# Altium PCB PCB1 - 修改mos管.PcbDoc
Units mil, origin at the board's own origin, x right, y up, seen from the top; angles counter-clockwise.
Board outline 3942.02 x 3942.03 mil, 2 copper layers (Top Layer, Bottom Layer); 43 components, 38 nets, 173 pads, 24 vias.
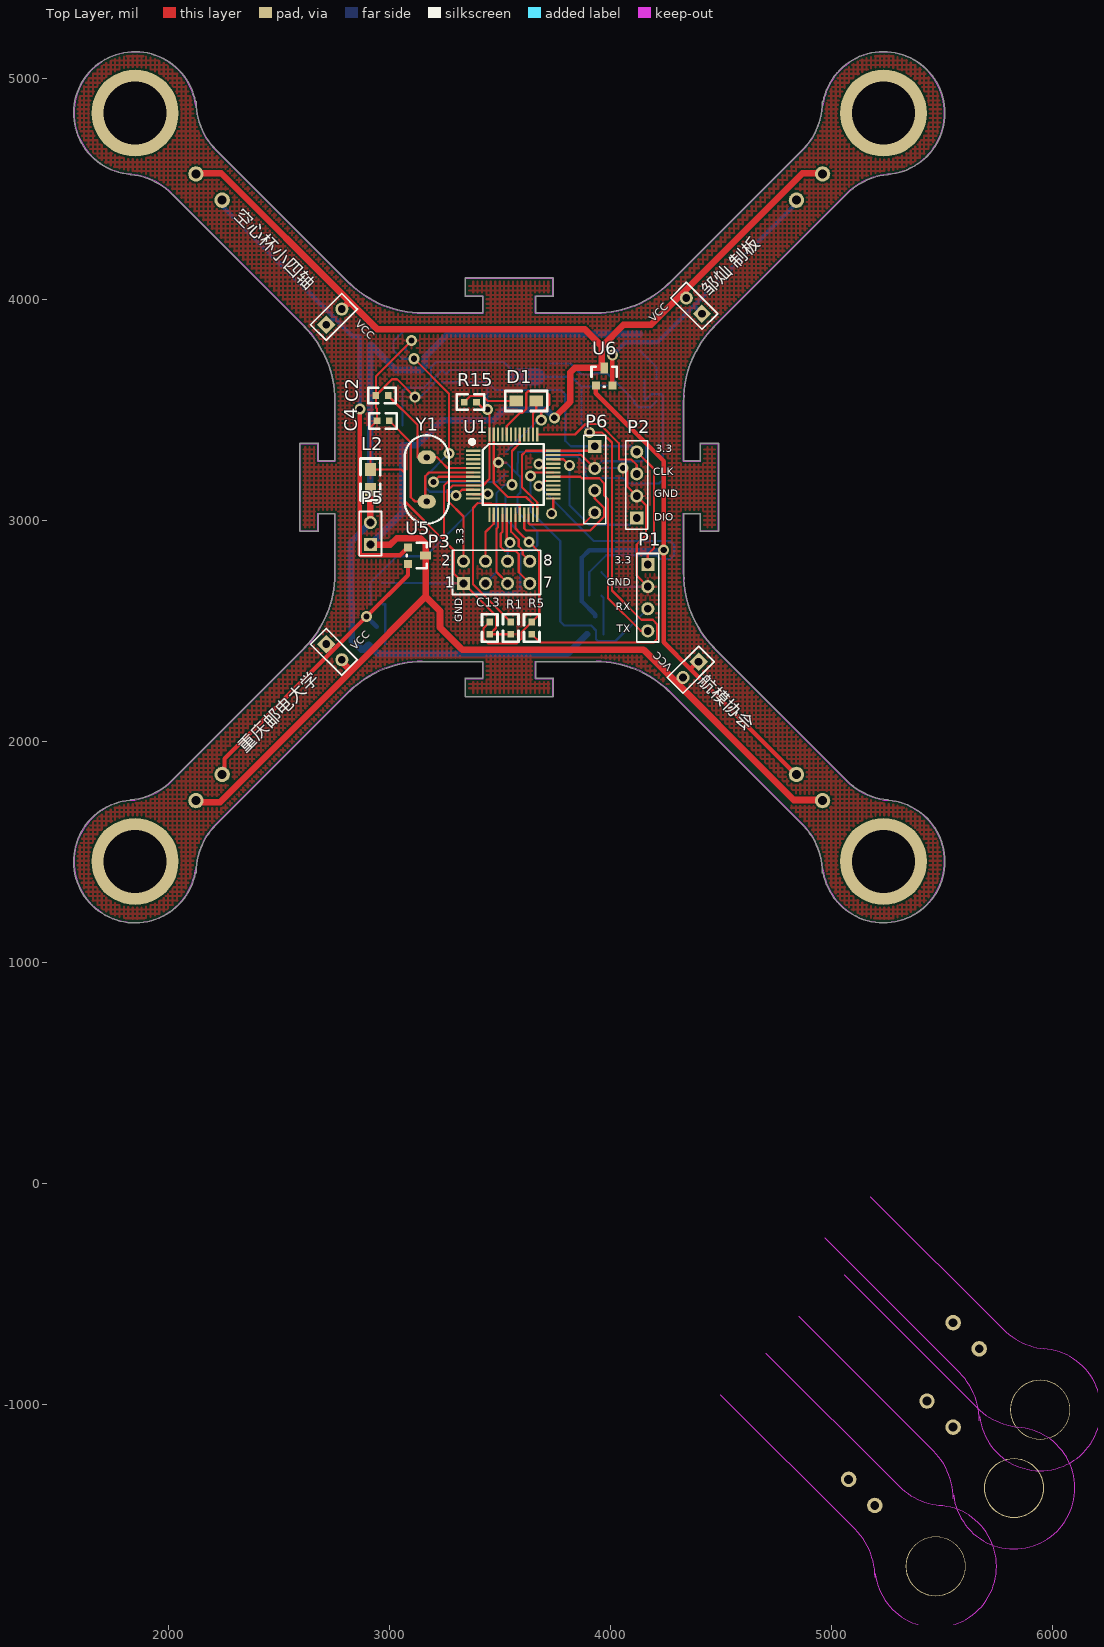
[diagram p0: Top Layer view]
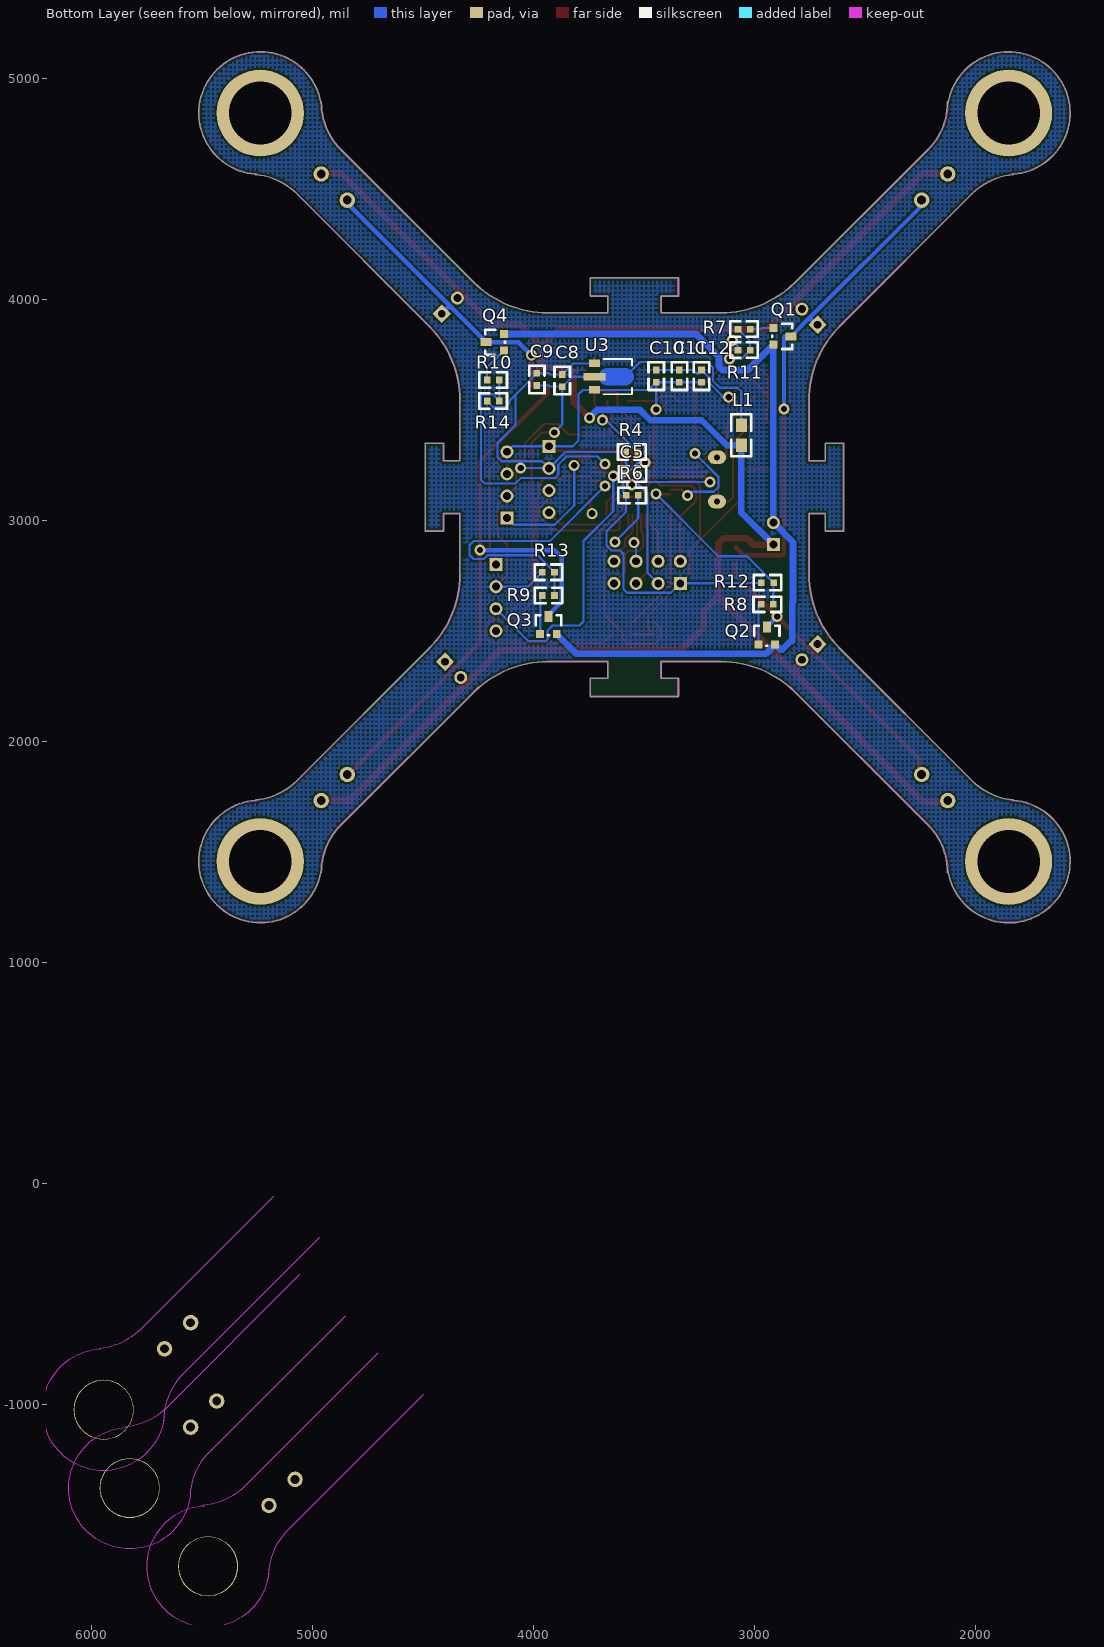
[diagram p1: Bottom Layer view, seen from below]

## Layer stack, top to bottom
Top Solder: solder mask 0.4, Solder Resist, Dk 3.5
Top Layer: signal copper 1.4
Dielectric 1: dielectric 12.6, FR-4, Dk 4.8
Bottom Layer: signal copper 1.4
Bottom Solder: solder mask 0.4, Solder Resist, Dk 3.5

## Board outline
1828.55,1733.94 ccw(c1850.39,1456.69) 2123.7,1405.26 ccw(c2124.88,1407.48) 2127.39,1407.48 cw(c2431.1,1407.48) 2216.33,1622.22 cw(c2431.1,1407.48) 2216.35,1622.24 2820.31,2226.2 ccw(c2820.49,2228.71) 2822.24,2226.9 cw(c3149.61,1889.76) 3149.61,2359.69 3422.68,2359.69 3422.68,2285.98 3346.46,2285.98 ccw(c3346.46,2283.46) 3343.94,2283.46 3343.94,2204.72 ccw(c3346.46,2204.72) 3346.46,2202.21 3740.16,2202.21 ccw(c3740.16,2204.72) 3742.67,2204.72 3742.67,2283.46 ccw(c3740.16,2283.46) 3740.16,2285.98 3663.93,2285.98 3663.93,2359.69 3937.01,2359.69 cw(c3937.01,1889.76) 4264.37,2226.9 ccw(c4266.12,2228.71) 4266.31,2226.2 4870.27,1622.24 ccw(c4872.05,1624.02) 4870.28,1622.22 ccw(c4655.51,1407.48) 4870.27,1622.24 4870.28,1622.22 cw(c4655.51,1407.48) 4959.22,1407.48 ccw(c4961.74,1407.48) 4962.91,1405.26 ccw(c5236.22,1456.69) 5514.33,1456.69 ccw(c5236.22,1456.69) 5258.06,1733.94 ccw(c5255.94,1732.6) 5256.18,1735.1 cw(c5285.43,2037.4) 5070.68,1822.64 4471.67,2421.65 ccw(c4469.16,2421.76) 4471.68,2421.76 ccw(c4469.16,2421.76) 4470.94,2423.54 cw(c4803.15,2755.91) 4333.22,2755.91 4333.22,3028.98 4406.93,3028.98 4406.93,2952.76 ccw(c4409.45,2952.76) 4409.45,2950.24 4488.19,2950.24 ccw(c4488.19,2952.76) 4490.7,2952.76 4490.7,3346.46 ccw(c4488.19,3346.46) 4488.19,3348.97 4409.45,3348.97 ccw(c4409.45,3346.46) 4406.93,3346.46 4406.93,3270.23 4333.22,3270.23 4333.22,3543.31 cw(c4803.15,3543.31) 4470.94,3875.67 ccw(c4469.16,3877.45) 4471.68,3877.45 ccw(c4469.16,3877.45) 4471.67,3877.57 5070.68,4476.57 cw(c5285.43,4261.81) 5256.18,4564.11 ccw(c5255.94,4566.61) 5258.06,4565.27 ccw(c5236.22,4842.52) 5514.33,4842.52 ccw(c5236.22,4842.52) 4962.91,4893.96 ccw(c4961.74,4891.73) 4959.22,4891.73 cw(c4655.51,4891.73) 4870.28,4676.99 cw(c4655.51,4891.73) 4870.27,4676.98 cw(c4872.05,4675.2) 4870.28,4676.99 4870.27,4676.98 4266.31,4073.01 ccw(c4266.12,4070.5) 4264.37,4072.31 cw(c3937.01,4409.45) 3937.01,3939.52 3663.93,3939.52 3663.93,4013.23 3740.16,4013.23 ccw(c3740.16,4015.75) 3742.67,4015.75 3742.67,4094.49 ccw(c3740.16,4094.49) 3740.16,4097 3346.46,4097 ccw(c3346.46,4094.49) 3343.94,4094.49 3343.94,4015.75 ccw(c3346.46,4015.75) 3346.46,4013.23 3422.68,4013.23 3422.68,3939.52 3149.61,3939.52 cw(c3149.61,4409.45) 2822.24,4072.31 ccw(c2820.49,4070.5) 2820.31,4073.01 2216.35,4676.98 cw(c2431.1,4891.73) 2216.33,4676.99 cw(c2431.1,4891.73) 2127.39,4891.73 ccw(c2124.88,4891.73) 2123.7,4893.96 ccw(c1850.39,4842.52) 1828.55,4565.27 ccw(c1830.68,4566.61) 1830.44,4564.11 cw(c1801.18,4261.81) 2015.94,4476.57 2614.94,3877.57 ccw(c2617.45,3877.45) 2615.67,3875.67 cw(c2283.46,3543.31) 2753.39,3543.31 2753.39,3270.23 2679.68,3270.23 2679.68,3346.46 ccw(c2677.17,3346.46) 2677.17,3348.97 2598.43,3348.97 ccw(c2598.43,3346.46) 2595.91,3346.46 2595.91,2952.76 ccw(c2598.43,2952.76) 2598.43,2950.24 2677.17,2950.24 ccw(c2677.17,2952.76) 2679.68,2952.76 2679.68,3028.98 2753.39,3028.98 2753.39,2755.91 cw(c2283.46,2755.91) 2615.67,2423.54 ccw(c2617.45,2421.76) 2614.94,2421.65 2015.94,1822.64 cw(c1801.18,2037.4) 1830.44,1735.1 ccw(c1830.68,1732.6)

## Design rules (kind name [scope] priority, off if disabled: settings)
Clearance [All] p1: gap=7.8
PolygonConnect [All] p1: connectstyle=Relief reliefconductorwidth=10 reliefentries=4 polygonreliefangle="90 Angle" airgapwidth=10
RoutingVias [All] p1: holewidth=28 width=50 viastyle="Through Hole" minholewidth=28 minwidth=50 maxholewidth=28 maxwidth=50
SolderMaskExpansion [All] p1: expansion=4
UnpouredPolygon [All] p1: allowunpoured=FALSE
Width Width_5 [InNet('MOTO4')] p1: maxlimit=20 minlimit=20 preferedwidth=20
Width Width_4 [InNet('MOTO3')] p2: maxlimit=20 minlimit=20 preferedwidth=20
Width Width_3 [InNet('MOTO2')] p3: maxlimit=20 minlimit=20 preferedwidth=20
Width Width_2 [InNet('MOTO1')] p4: maxlimit=20 minlimit=20 preferedwidth=20
Width Width_1 [InNet('VCC_BAT')] p5: maxlimit=30 minlimit=30 preferedwidth=30
Width [InNet('GND_BAT')] p6: maxlimit=30 minlimit=30 preferedwidth=30
29 further rules are at their usual default settings.

## Classes and differential pairs
component class "Sheet1 - 修改mos管": C2 C4 C5 C8 C9 C10 C11 C12 C13 D1 L1 L2 P1 P2 P3 P5 P6 Q1 Q2 Q3 Q4 R1 R4 R5 R6 R7 R8 R9 R10 R11 R12 R13 R14 R15 U1 U3 U5 U6 Y1

## Components (designator, comment, footprint, x,y, rotation, side; value= is the part's Value field where it differs from the comment)
C2 "cap" 0603 2940,3565 r0 top
C4 "cap" 0603 2945,3450 r0 top
C5 "cap" 0603 3580,3210 r180 bottom
C8 "cap" 0603 3870,3660 r270 bottom
C9 "cap" 0603 3985,3665 r270 bottom
C10 "cap" 0603 3445,3680 r270 bottom
C11 "cap" 0603 3340,3680 r270 bottom
C12 "cap" 0603 3240,3680 r270 bottom
C13 "cap" 0603 3455,2485 r90 top
D1 "LED0" 0805 3575,3540 r0 top
L1 "Inductor" 0805 3060,3340 r90 bottom
L2 "Inductor10mH" 0805 2915,3230 r270 top
P1 "Header 4" HDR1X4 4170,2800 r270 top
P2 "Header 4" HDR1X4 4120,3010 r90 top
P3 "Header 4X2" HDR2X4 3336,2715 r0 top
P5 "Header 2" HDR1X2 2915,2890 r90 top
P6 "Header 4" HDR1X4 3930,3335 r270 top
Q1 "SI2302" SOT-23 2915,3870 r270 bottom
Q2 "SI2302" SOT-23 2982,2438 r180 bottom
Q3 "SI2302" SOT-23 3970,2485 r180 bottom
Q4 "SI2302" SOT-23 4134,3768 r90 bottom
R1 "res" 0603 3550,2540 r270 top
R4 "res" 0603 3583,3309 r180 bottom
R5 "res" 0603 3645,2485 r90 top
R6 "res" 0603 3526,3113 r0 bottom
R7 "res" 0603 3075,3865 r180 bottom
R8 "res" 0603 2915,2620 r0 bottom
R9 "res" 0603 3905,2660 r0 bottom
R10 "res" 0603 4155,3635 r0 bottom
R11 "res" 0603 3075,3770 r180 bottom
R12 "res" 0603 2969,2718 r180 bottom
R13 "res" 0603 3960,2765 r180 bottom
R14 "res" 0603 4210,3540 r180 bottom
R15 "res" 0603 3395,3535 r180 top
U1 "STM32F103C8T6" LQFP48S 3380,3315 r0 top
U3 "XC6203E" SOT-89 3725,3710 r270 bottom
U5 "BAT54C" SOT-23 3085,2878 r270 top
U6 "BAT54C" SOT-23 3935,3610 r0 top
Y1 "5032xtal" XTAL 3170,3185 r90 top
? "Comment" HDR1X2 2715,2440 r315 top
? "Comment" HDR1X2 2715,3885 r45 top
? "Comment" HDR1X2 4415,3935 r135 top
? "Comment" HDR1X2 4400,2360 r225 top

## Footprints (in the part's own frame and the unit in brackets; to place one, negate y for a bottom-side part, rotate by r counter-clockwise, add the part's x,y. Pads: shape width x height; smd on the part's side, far side on the other; paste and mask are expansions set on the pad)
0603 [mil]
  rect 30x30 smd: 1(0,0) 2(55,0)
  silkscreen extent -35,-35 90,35
0805 [mil]
  rect 60x50 smd: 1(0,0) 2(90,0)
  silkscreen extent -50,-45 140,45
HDR1X2 [mm] "Connector; Header; 2 Position"
  rect 1.5x1.5 hole 0.9: 1(0,0)
  round 1.5 hole 0.9: 2(2.54,0)
  silkscreen extent -1.27,-1.27 3.81,1.27
HDR1X4 [mm] "Connector; Header; 4 Position"
  rect 1.5x1.5 hole 0.9: 1(0,0)
  round 1.5 hole 0.9: 2(2.54,0) 3(5.08,0) 4(7.62,0)
  silkscreen extent -1.27,-1.27 8.89,1.27
HDR2X4 [mm] "Connector; Header; 4x2 Position"
  rect 1.5x1.5 hole 0.9: 1(0,0)
  round 1.5 hole 0.9: 2(0,2.54) 3(2.54,0) 4(2.54,2.54) 5(5.08,0) 6(5.08,2.54) 7(7.62,0) 8(7.62,2.54)
  silkscreen extent -1.27,-1.27 8.89,3.81
LQFP48S [mil] "DPIN-0.5"
  rect 65x10 smd: 1(0.42,0.29) 2(0.42,-19.39) 3(0.42,-39.08) 4(0.42,-58.76) 5(0.42,-78.45) 6(0.42,-98.13) 7(0.42,-117.82) 8(0.42,-137.5) 9(0.42,-157.19) 10(0.42,-176.87) 11(0.42,-196.56) 12(0.42,-216.24) 25(362.63,-216.24) 26(362.63,-196.56) 27(362.63,-176.87) 28(362.63,-157.19) 29(362.63,-137.5) 30(362.63,-117.82) 31(362.63,-98.13) 32(362.63,-78.45) 33(362.63,-58.76) 34(362.63,-39.08) 35(362.63,-19.39) 36(362.63,0.29)
  rect 10x65 smd: 13(73.26,-289.08) 14(92.94,-289.08) 15(112.63,-289.08) 16(132.31,-289.08) 17(152,-289.08) 18(171.68,-289.08) 19(191.37,-289.08) 20(211.05,-289.08) 21(230.74,-289.08) 22(250.42,-289.08) 23(270.11,-289.08) 24(289.79,-289.08) 37(289.79,73.13) 38(270.11,73.13) 39(250.42,73.13) 40(230.74,73.13) 41(211.05,73.13) 42(191.37,73.13) 43(171.68,73.13) 44(152,73.13) 45(132.31,73.13) 46(112.63,73.13) 47(92.94,73.13) 48(73.26,73.13)
  silkscreen extent -10,-246 319,46
SOT-23 [mil]
  rect 36x36 smd: 1(0,0) 2(75,0)
  rect 36x50 smd: 3(38,80)
  silkscreen extent -20,-5 95,85
SOT-89 [mil]
  rect 34x50 smd: 1(0,0) 3(120,0)
  rect 34x100 smd: 2(60,0)
  Top Layer lines w80: 60,140 60,93 60,62 60,60
  silkscreen extent -20,40 140,170
XTAL [mil]
  oval 62x82 hole 28: 1(-100,0) 2(100,0)
  silkscreen extent -200,-100 200,100

## Part data
D1: "Typical INFRARED GaAs LED"
L2: library part Inductor
P1 P2 P6: "Header, 4-Pin"
P3: "Header, 4-Pin, Dual row"
P5: "Header, 2-Pin"
U3: library part XC6203

## Free pads (board coordinates)
  round 70 hole 40: 0(2125.98,1732.28) 0(2125.98,4566.93) 0(4960.63,1732.28) 0(4960.63,4566.93) 0(5196.85,-1456.69) 0(5551.18,-1102.36) 0(5669.29,-748.03) 1(2244.09,1850.39) 1(2244.09,4448.82) 1(4842.52,1850.39) 1(4842.52,4448.82) 1(5078.74,-1338.58) 1(5433.07,-984.25) 1(5551.18,-629.92)
  round 50 hole 32: 2(3735,3030)
  round 393.7 hole 283.46: 3(1850.39,1456.69) 3(1850.39,4842.52) 3(5236.22,1456.69) 3(5236.22,4842.52)
  round 271.65 hole 263.78: 3(5472.44,-1732.28) 3(5826.77,-1377.95) 3(5944.88,-1023.62)

## Via types
v1: diameter 50, hole 28, Top Layer to Bottom Layer, 24 vias

## Nets (pads, with @x,y where several pads share a name; then routed paths per layer and width w, separated by ;. In a path a pad name is that pad's centre, name@x,y a point inside that pad or via, vN(x,y) a via of type N, cw(c..) or ccw(c..) an arc to the next point about the centre after c; other vN are vias at no path point)
3.3V: C10.2 C11.2 C12.2 P1.1 P2.4 P3.2 P6.1 R15.1 U1.9 U1.24 U1.36 U1.48 U3.3 | length 3413.8
  Top Layer w10: P3.2 3336,3017.2 3265.2,3088 3265.2,3136 3287.01,3157.81 U1.9 3424,3157.81 3453.26,3187.07 U1.48 3453.26,3476.74 ; R15.1 3453.26,3476.74 ; v1(3445,3501) 3453.26,3492.74 3453.26,3476.74 ; U1.24 3669.79,3081.21 3601,3150 3601,3296 3620.29,3315.29 U1.36 3910.29,3315.29 P6.1 ; P2.4 4197.93,3232.07 4197.93,2874.14 4170,2846.21 P1.1
  Bottom Layer w10: C12.2 C11.2 C10.2 ; v1(3445,3501) C10.2 ; P2.4 4095,3335 P6.1 3822,3335 3797,3360 3797,3569 3776,3590 U3.3 3480,3590 C10.2
AD: C13.2 R5.2 R6.1 U1.19 | length 1172.3
  Top Layer w10: C13.2 3427,2512 3427,2464 3448,2443 3577,2443 3598,2464 3598,2493 R5.2 3679,2574 3679,2856.3 v1@3632.65,2902.65 ; U1.19 3571.37,2962.63 3589.84,2944.16 v1@3632.64,2902.66 ; v1(3632,2902) v1@3632.65,2902.65
  Bottom Layer w10: R6.1 3526,3008 v1(3632,2902)
GND: C2.1 C4.1 C5.1 C8.1 C9.1 C10.1 C11.1 C12.1 C13.1 L2.1 P1.2 P2.2 P3.1 P6.2 R1.2 R4.1 R6.2 R11.1 R12.1 R13.1 R14.1 U1.8 U1.23 U1.35 U1.47 U3.1 | length 7653.6
  Top Layer w10: v1(3101,3813) 2940,3652 C2.1 ; v1(3117,3557) 3036,3638 3013,3638 C2.1 ; U1.8 3268.02,3177.5 3247.4,3156.87 3247.4,2909.6 ; U1.47 3472.94,3283.06 ; v1(3495,3261) 3472.94,3283.06 ; R1.2 C13.1 3483,2513 3483,2568 P3.1 3293,2758 3293,2864 3247.4,2909.6 ; U1.23 3650.11,3075 3619.06,3106.05 3536,3106.05 3472.94,3169.1 3472.94,3283.06 ; U1.35 3869.39,3295.61 P6.2 ; v1(4058,3237) 4064,3237 4077,3224 4077,3153 P2.2 4162.33,3067.67 4162.33,2932.67 4120,2890.34 4120,2750 P1.2 ; C2.1 2940,3510 2945,3505 C4.1 2915,3420 L2.1 3056,3230 3072,3214 3072,3085 3247.4,2909.6
  Bottom Layer w10: R12.1 3156,2715 P3.1 3379,2672 3577,2672 3593.2,2688.2 3593.2,2848 3609.4,2864.2 3648,2864.2 3669.8,2886 3669.8,2950 3581,3038.8 R6.2 3593.8,3125.8 3593.8,3196.2 C5.1 ; R11.1 3075,3787 v1(3101,3813) ; v1(3117,3557) 3140.37,3557 3207.6,3624.23 3207.6,3647.6 C12.1 3257.8,3662.2 3275.6,3680 C11.1 C10.1 ; v1(3495,3261) 3529,3261 C5.1 ; U3.1 3820,3710 C8.1 3925,3660 3930,3665 C9.1 4081,3569 ; R13.1 4025,2700 P1.2 ; v1(4058,3237) P6.2@3932,3237 ; R14.1 4182,3512 4128,3512 4109,3531 4109,3541 4081,3569 ; C5.1 3580,3258 3583,3261 R4.1 3856,3309 P6.2 P6.2@3932,3237 ; P6.2@3932,3237 3962,3267 4144,3267 4163,3286 4163,3350 4081,3432 4081,3569
GND_BAT: L2.2 P5.2 Q1.2 Q2.2 Q3.2 Q4.2 | length 4029.1
  Top Layer w30: P5.2 L2.2
  Bottom Layer w30: 2830,2454 2830,2628 2826,2632 2826,2901 P5.2 Q1.2 3030,3680 3144.8,3680 3160.8,3696 3160.8,3738.8 3265,3843 Q4.2 ; 2835,2455 2875,2415 2884,2415 Q2.2 2949,2396 3806,2396 Q3.2
INC: pad.2 U1.25 | length 66.1
  Top Layer w10: pad.2@3742.63,3032.63 U1.25
LED1: D1.2 U1.38 | length 158
  Top Layer w10: U1.38 3650.11,3483 3665,3497.89 D1.2
MISO: P3.7 U1.16 | length 396.7
  Top Layer w10: U1.16 3512.31,2948.07 3505.14,2940.89 3505.14,2880 3523.94,2861.2 3572.8,2861.2 3586,2848 3586,2765 P3.7
MOSI: P3.6 U1.17 | length 220.9
  Top Layer w10: U1.17 3532,2913 v1(3546,2899)
  Bottom Layer w10: P3.6 3536,2889 v1(3546,2899)
MOTO1: ?.1@2715,3885 pad.1@2244.09,4448.82 Q1.3 U5.1 | length 2167.9
  Top Layer w20: v1(2867,3504) 2867,2847 2872,2842 3049,2842 U5.1
  Bottom Layer w20: pad.1@2245,4455 2245,4422 2751,3916 ; ?.1@2715,3880 2751,3916 ; v1(2867,3504) 2867,3828 2863,3832 Q1.3 2751,3916
MOTO2: ?.1@2715,2440 pad.1@2244.09,1850.39 Q2.3 U5.2 | length 1378.8
  Top Layer w20: pad.1@2240,1855 2255,1870 2255,1922 2746.5,2413.5 ; 2731.5,2413.5 2746.5,2413.5 ; U5.2 3085,2752 v1(2897.5,2564.5) 2746.5,2413.5
  Bottom Layer w20: v1(2897.5,2564.5) Q2.3
MOTO3: ?.1@4400,2360 pad.1@4842.52,1850.39 Q3.3 U6.1 | length 2863.5
  Top Layer w20: U6.1 3935,3575 4242,3268 v1(4242,2865.13) 4242,2448 4362.5,2327.5 ; ?.1@4395,2360 4362.5,2327.5 ; pad.1@4845,1845 4362.5,2327.5
  Bottom Layer w20: Q3.3 3932,2573 3872,2633 3872,2832 3905.13,2865.13 v1(4242,2865.13)
MOTO4: ?.1@4415,3935 pad.1@4842.52,4448.82 Q4.3 U6.2 | length 1328.8
  Top Layer w20: U6.2 v1(4010,3747)
  Bottom Layer w20: v1(4010,3747) 4069,3806 Q4.3 4379,3971 ; ?.1@4420,3930 4415,3935 4379,3971 ; pad.1@4845,4450 4845,4437 4379,3971
NetC2_2: C2.2 U1.5 Y1.2 | length 607.9
  Top Layer w10: C2.2 3128,3432 3128,3285 Y1.2 3216,3285 3236,3265 3263.45,3236.55 U1.5
NetC4_2: C4.2 U1.6 Y1.1 | length 805.7
  Top Layer w10: C4.2 3098,3352 3098,3104 3117,3085 Y1.1@3163.2,3085 ; Y1.1 Y1.1@3163.2,3085 ; U1.6 3180.07,3216.87 3163.2,3200 Y1.1@3163.2,3085
NetD1_1: D1.1 R15.2 | length 256.1
  Top Layer w10: R15.2 3368,3563 3423,3563 3446,3540 D1.1
NetQ1_G: Q1.1 R7.2 | length 107.1
  Bottom Layer w10: Q1.1 2965,3870 2970,3865 R7.2
NetQ2_G: Q2.1 R8.2 | length 194
  Bottom Layer w10: R8.2 2982,2620 Q2.1
NetQ3_G: Q3.1 R9.2 | length 179.1
  Bottom Layer w10: R9.2 3970,2650 Q3.1
NetQ4_G: Q4.1 R10.2 | length 164.5
  Bottom Layer w10: Q4.1 4210,3692 R10.2
NetR1_1: R1.1 U1.20 | length 854.2
  Top Layer w10: R1.1 3379,2711 3379,3056 3401,3078 3591.05,3072 U1.20
NetR4_2: R4.2 U1.44 | length 693.9
  Top Layer w10: U1.44 3532,3427 3592,3487 3603,3487 3620,3504 3620,3576 3628,3584 3707.76,3584 3723.76,3568 3723.76,3522.76 3688,3487 v1(3688,3453)
  Bottom Layer w10: R4.2 3672,3453 v1(3688,3453)
NRST: C5.2 U1.7 | length 527.9
  Top Layer w10: v1(3201,3174) 3224.18,3197.18 U1.7
  Bottom Layer w10: v1(3201,3174) 3489,3174 C5.2
PWM1: R7.1 R11.2 U1.10 | length 1161
  Top Layer w10: v1(3113,3731) 3270,3574 v1(3270,3303) ; v1(3303,3112.13) 3329,3138.13 U1.10
  Bottom Layer w10: R7.1 3020,3810 R11.2 3059,3731 v1(3113,3731) ; v1(3270,3303) 3163.2,3196.2 3163.2,3149.8 3184,3129 3286.13,3129 v1(3303,3112.13)
PWM2: R8.1 R12.2 U1.11 | length 863.2
  Top Layer w10: U1.11 3444.44,3118.44 v1(3446,3120)
  Bottom Layer w10: R8.1 2915,2668 2914,2669 R12.2 3034,2838 3164,2838 v1(3446,3120)
PWM3: R9.1 R13.2 U1.29 | length 1380.2
  Top Layer w10: v1(3677,3156) 3698.5,3177.5 U1.29
  Bottom Layer w10: v1(3677,3156) 3927,2906 4272,2906 4290,2888 4290,2843 4272,2825 4225.33,2825 4208,2842.33 3982.33,2842.33 R13.2 R9.1
PWM4: R10.1 R14.2 U1.32 | length 1305.7
  Top Layer w10: v1(3677,3255) 3695.45,3236.55 U1.32
  Bottom Layer w10: v1(3677,3255) 3711.02,3289.02 3850.8,3289.02 3887.67,3252.15 3887.67,3206.33 3903,3191 4058,3191 4082,3167 4221,3167 4238,3184 4238,3564 4232,3570 4185,3570 R14.2 R10.1
RX1: P1.3 U1.31 | length 1341.5
  Top Layer w10: v1(3639,3201) 3654.87,3216.87 U1.31
  Bottom Layer w10: v1(3639,3201) 3639,3041.37 3774,2906.37 3774,2542 3792,2524 3914,2524 3936,2502 3936,2462 3944,2454 4024,2454 P1.3
SCL: P6.3 U1.21 | length 590.4
  Top Layer w10: U1.21 3610.74,2962.82 3619.56,2954 3910,2954 3972.33,3016.33 3972.33,3056.67 3930,3099 P6.3
SDA: P6.4 U1.22 | length 364.1
  Top Layer w10: U1.22 3630.42,2986.2 3636,2980.62 3875.62,2980.62 P6.4
SWCLK: P2.3 U1.37 | length 630.2
  Top Layer w10: U1.37 3669.79,3388 3840.2,3388 3888,3435.8 3952.2,3435.8 4039.18,3348.82 4039.55,3275.45 4095.47,3275.45 4120,3250.92 P2.3
SWDIO: P2.1 U1.34 | length 618.4
  Top Layer w10: U1.34 3789.08,3275.92 v1(3816,3249)
  Bottom Layer w10: v1(3816,3249) 3816,3068 3904,2980 4090,2980 P2.1
TX1: P1.4 U1.30 | length 1010.2
  Top Layer w10: U1.30 3864.82,3197.18 3872,3190 3950,3190 3973,3167 3973,3112.26 3990.13,3095.13 3990.13,2647.96 4138.09,2500 P1.4
VCC: C8.2 C9.2 L1.2 R5.1 U3.2 | length 3073.1
  Top Layer w10: R5.1 3682,2448 4197,2448 4213,2464 4213,2529 4192,2550 4141,2550 4007.93,2683.07 4007.93,3352.07 3962,3398 v1(3906,3398)
  Bottom Layer w10: L1.2 3060,3584 3076,3600 3156.6,3600 3188.6,3632 3188.6,3692.07 3213.06,3716.53 3518.47,3716.53 3585,3650 ; 3665,3650 U3.2 3825,3650 C8.2 ; v1(3906,3398) 3870,3434 C8.2 ; C9.2 3930,3610 3925,3605 C8.2
VCC_BAT: ?.2 L1.1 P5.1 pad.0@2125.98,1732.28 pad.0@2125.98,4566.93 pad.0@4960.63,1732.28 pad.0@4960.63,4566.93 U5.3 U6.3 | length 9527.7
  Top Layer w30: pad.0@2125,4565 2130,4570 2240,4570 2820,3990 ; pad.0@2140,1725 2235,1725 2835,2325 ; ?.2@2780,2365 2820,2325 2835,2325 ; ?.2@2785,3955 2785.71,3955.71 2820,3990 ; P5.1 3005,2890 3034,2919 3142,2919 3165,2896 U5.3 3165,2655 ; v1(3747,3464) 3819,3536 3819,3669 3840,3690 U6.3 3962.2,3700.8 3962.2,3787.2 ; ?.2@4327.5,4022.5 ?.2@4322.5,4022.5 ; pad.0@4955,4570 4870,4570 ?.2@4322.5,4022.5 ; pad.0@4960,1735 4830,1735 4150,2415 3330,2415 3230,2515 3230,2590 3165,2655 ; 2820,3990 2945,3865 3884.4,3865 3962.2,3787.2 ; 2835,2325 3165,2655 ; 3962.2,3787.2 4060,3885 4185,3885 ?.2@4322.5,4022.5
  Bottom Layer w30: P5.1 3060,3035 L1.1 3126,3340 3239,3453 3472,3453 3520,3501 3710,3501 v1(3747,3464)
W_CE: P3.3 U1.41 | length 756.7
  Top Layer w10: v1(3556,3161) 3556,3314 3591.05,3349.05 U1.41
  Bottom Layer w10: P3.3 3485,2764 3485,3123 3523,3161 v1(3556,3161)
W_CSN: P3.4 U1.14 | length 226.2
  Top Layer w10: P3.4 3436,2947.36 3472.94,2984.3 U1.14
W_IRQ: P3.8 U1.18 | length 245.8
  Top Layer w10: U1.18 3551.68,2948.02 3586.2,2913.5 3586.2,2882.3 3604.5,2864 3604.5,2846.5 P3.8
W_SCK: P3.5 U1.15 | length 335.1
  Top Layer w10: U1.15 3492.63,2968.39 3485.14,2960.89 3485.14,2765.86 P3.5
pads on no net: U1.1 U1.2 U1.3 U1.4 U1.12 U1.13 U1.26 U1.27 U1.28 U1.33 U1.39 U1.40 U1.42 U1.43 U1.45 U1.46

## Polygon pours and split planes (outlines as drawn)
GND on Top Layer "Top Layer-No Net" (hatched 90Degree grid 20 track 10, remove dead copper, pour order 4): 1055,5680 1055,540 5890,540 6285,935 6030,1190 6030,5535
GND on Bottom Layer "Top Layer-No Net" (hatched 90Degree grid 20 track 10, remove dead copper, pour order 6): 1005,5750 1005,695 935,625 975,665 6560,665 6560,5265 6305,5520

## Keep-outs
Keep-Out Layer:
  lines w5: 1830.68,1732.6 ccw(c1801.18,2037.4) 2017.72,1820.87 2618.11,2421.26 ; 1830.68,4566.61 cw(c1801.18,4261.81) 2017.72,4478.35 2618.11,3877.95 ; 1835.75,1731.89 ccw(c1850.39,1456.69) 2124.04,1424.02 ; 1835.75,4567.32 cw(c1850.39,4842.52) 2124.04,4875.19 ; 2124.88,1407.48 cw(c2431.1,1407.48) 2214.57,1624.02 2824.8,2234.25 ; 2124.88,4891.73 ccw(c2431.1,4891.73) 2214.57,4675.2 2824.8,4064.96 ; 2617.45,2421.76 ccw(c2283.46,2755.91) 2755.91,2755.91 2755.91,3031.5 2677.17,3031.5 2677.17,2952.76 2598.43,2952.76 2598.43,3346.46 2677.17,3346.46 2677.17,3267.72 2755.91,3267.72 2755.91,3543.31 ccw(c2283.46,3543.31) 2617.45,3877.45 ; 2820.49,2228.71 cw(c3149.61,1889.76) 3149.61,2362.2 3425.2,2362.2 3425.2,2283.46 3346.46,2283.46 3346.46,2204.72 3740.16,2204.72 3740.16,2283.46 3661.42,2283.46 3661.42,2362.2 3937.01,2362.2 cw(c3937.01,1889.76) 4266.12,2228.71 ; 2820.49,4070.5 ccw(c3149.61,4409.45) 3149.61,3937.01 3425.2,3937.01 3425.2,4015.75 3346.46,4015.75 3346.46,4094.49 3740.16,4094.49 3740.16,4015.75 3661.42,4015.75 3661.42,3937.01 3937.01,3937.01 ccw(c3937.01,4409.45) 4266.12,4070.5 ; 2834.65,2244.09 2814.96,2224.41 ; 4251.97,2244.09 4271.65,2224.41 ; 4469.16,2421.76 cw(c4803.15,2755.91) 4330.71,2755.91 4330.71,3031.5 4409.45,3031.5 4409.45,2952.76 4488.19,2952.76 4488.19,3346.46 4409.45,3346.46 4409.45,3267.72 4330.71,3267.72 4330.71,3543.31 cw(c4803.15,3543.31) 4469.16,3877.45 ; 4961.74,1407.48 ccw(c4655.51,1407.48) 4872.05,1624.02 4261.81,2234.25 ; 4961.74,4891.73 cw(c4655.51,4891.73) 4872.05,4675.2 4261.81,4064.96 ; 4962.57,1424.02 ccw(c5236.22,1456.69) 5250.87,1731.89 ; 4962.57,4875.19 cw(c5236.22,4842.52) 5250.87,4567.32 ; 5197.96,-1781.5 ccw(c4891.73,-1781.5) 5108.27,-1564.96 4498.03,-954.72 ; 5198.79,-1764.96 ccw(c5472.44,-1732.28) 5487.09,-1457.08 ; 5255.94,1732.6 cw(c5285.43,2037.4) 5068.9,1820.87 4468.5,2421.26 ; 5255.94,4566.61 ccw(c5285.43,4261.81) 5068.9,4478.35 4468.5,3877.95 ; 5492.16,-1456.38 cw(c5521.65,-1151.57) 5305.12,-1368.11 4704.72,-767.72 ; 5552.29,-1427.17 ccw(c5246.06,-1427.17) 5462.6,-1210.63 4852.36,-600.39 ; 5553.13,-1410.63 ccw(c5826.77,-1377.95) 5841.42,-1102.75 ; 5670.4,-1072.83 ccw(c5364.17,-1072.83) 5580.71,-856.3 4970.47,-246.06 ; 5671.24,-1056.3 ccw(c5944.88,-1023.62) 5959.53,-748.42 ; 5846.49,-1102.05 cw(c5875.98,-797.24) 5659.45,-1013.78 5059.06,-413.39 ; 5964.6,-747.72 cw(c5994.09,-442.91) 5777.56,-659.45 5177.17,-59.06 ; 2618.11,2421.26 2618.11,2421.26 ; 2618.11,3877.95 2618.11,3877.95 ; 2814.96,2224.41 2814.96,2224.41 ; 2824.8,2234.25 2824.8,2234.25 ; 2824.8,2234.25 2824.8,2234.25 ; 2824.8,4064.96 2824.8,4064.96 ; 2824.8,4064.96 2824.8,4064.96 ; 4261.81,2234.25 4261.81,2234.25 ; 4261.81,2234.25 4261.81,2234.25 ; 4261.81,4064.96 4261.81,4064.96 ; 4261.81,4064.96 4261.81,4064.96 ; 4271.65,2224.41 4271.65,2224.41 ; 4468.5,2421.26 4468.5,2421.26 ; 4468.5,3877.95 4468.5,3877.95 ; 4498.03,-954.72 4498.03,-954.72 ; 4498.03,-954.72 4498.03,-954.72 ; 4704.72,-767.72 4704.72,-767.72 ; 4852.36,-600.39 4852.36,-600.39 ; 4852.36,-600.39 4852.36,-600.39 ; 4970.47,-246.06 4970.47,-246.06 ; 4970.47,-246.06 4970.47,-246.06 ; 5059.06,-413.39 5059.06,-413.39 ; 5177.17,-59.06 5177.17,-59.06 ; 2814.96,4074.8 2814.96,4074.8 ; 4271.65,4074.8 4271.65,4074.8 ; 4507.87,-964.57 4507.87,-964.57 ; 4862.2,-610.24 4862.2,-610.24 ; 4980.31,-255.91 4980.31,-255.91

## Silkscreen, mask and mechanical layers (free items; w line width, h text height)
Top Overlay:
  text "空心杯小四轴" at 2280,4360 h100 r315
  text "邹灿 制板" at 4460,3995 h100 r45
  text "VCC" at 4205,3885 h60 r45
  text "VCC" at 2835,3875 h60 r315
  text "3.3" at 4205,3295 h60
  text "CLK" at 4195,3190 h60
  text "GND" at 4200,3090 h60
  text "DIO" at 4200,2985 h60
  text "3.3" at 3350,2890 h60 r90
  text "3.3" at 4020,2790 h60
  text "GND" at 3985,2690 h60
  text "RX" at 4025,2580 h60
  text "GND" at 3345,2540 h60 r90
  text "TX" at 4030,2480 h60
  text "VCC" at 2855,2400 h60 r45
  text "VCC" at 4295,2350 h60 r135
  text "航模协会" at 4380,2255 h100 r315
  text "重庆邮电大学" at 2365,1930 h100 r45

## Text inside footprints (layer, text, board x,y; h text height)
P3: Top Overlay "8" at 3696,2795 h50; Top Overlay "7" at 3696,2695 h50; Top Overlay "1" at 3252,2694 h50; Top Overlay "2" at 3236,2795 h50